# Altium PCB probe.PcbDoc (part 2 of 2)
Units mil, origin at the board's own origin, x right, y up, seen from the top; angles counter-clockwise.
Board outline 2800 x 2200 mil, 4 copper layers (Top Layer, Internal Plane 2, Internal Plane 1, Bottom Layer), stack 30.634 mil thick; 179 components, 135 nets, 563 pads, 179 vias.
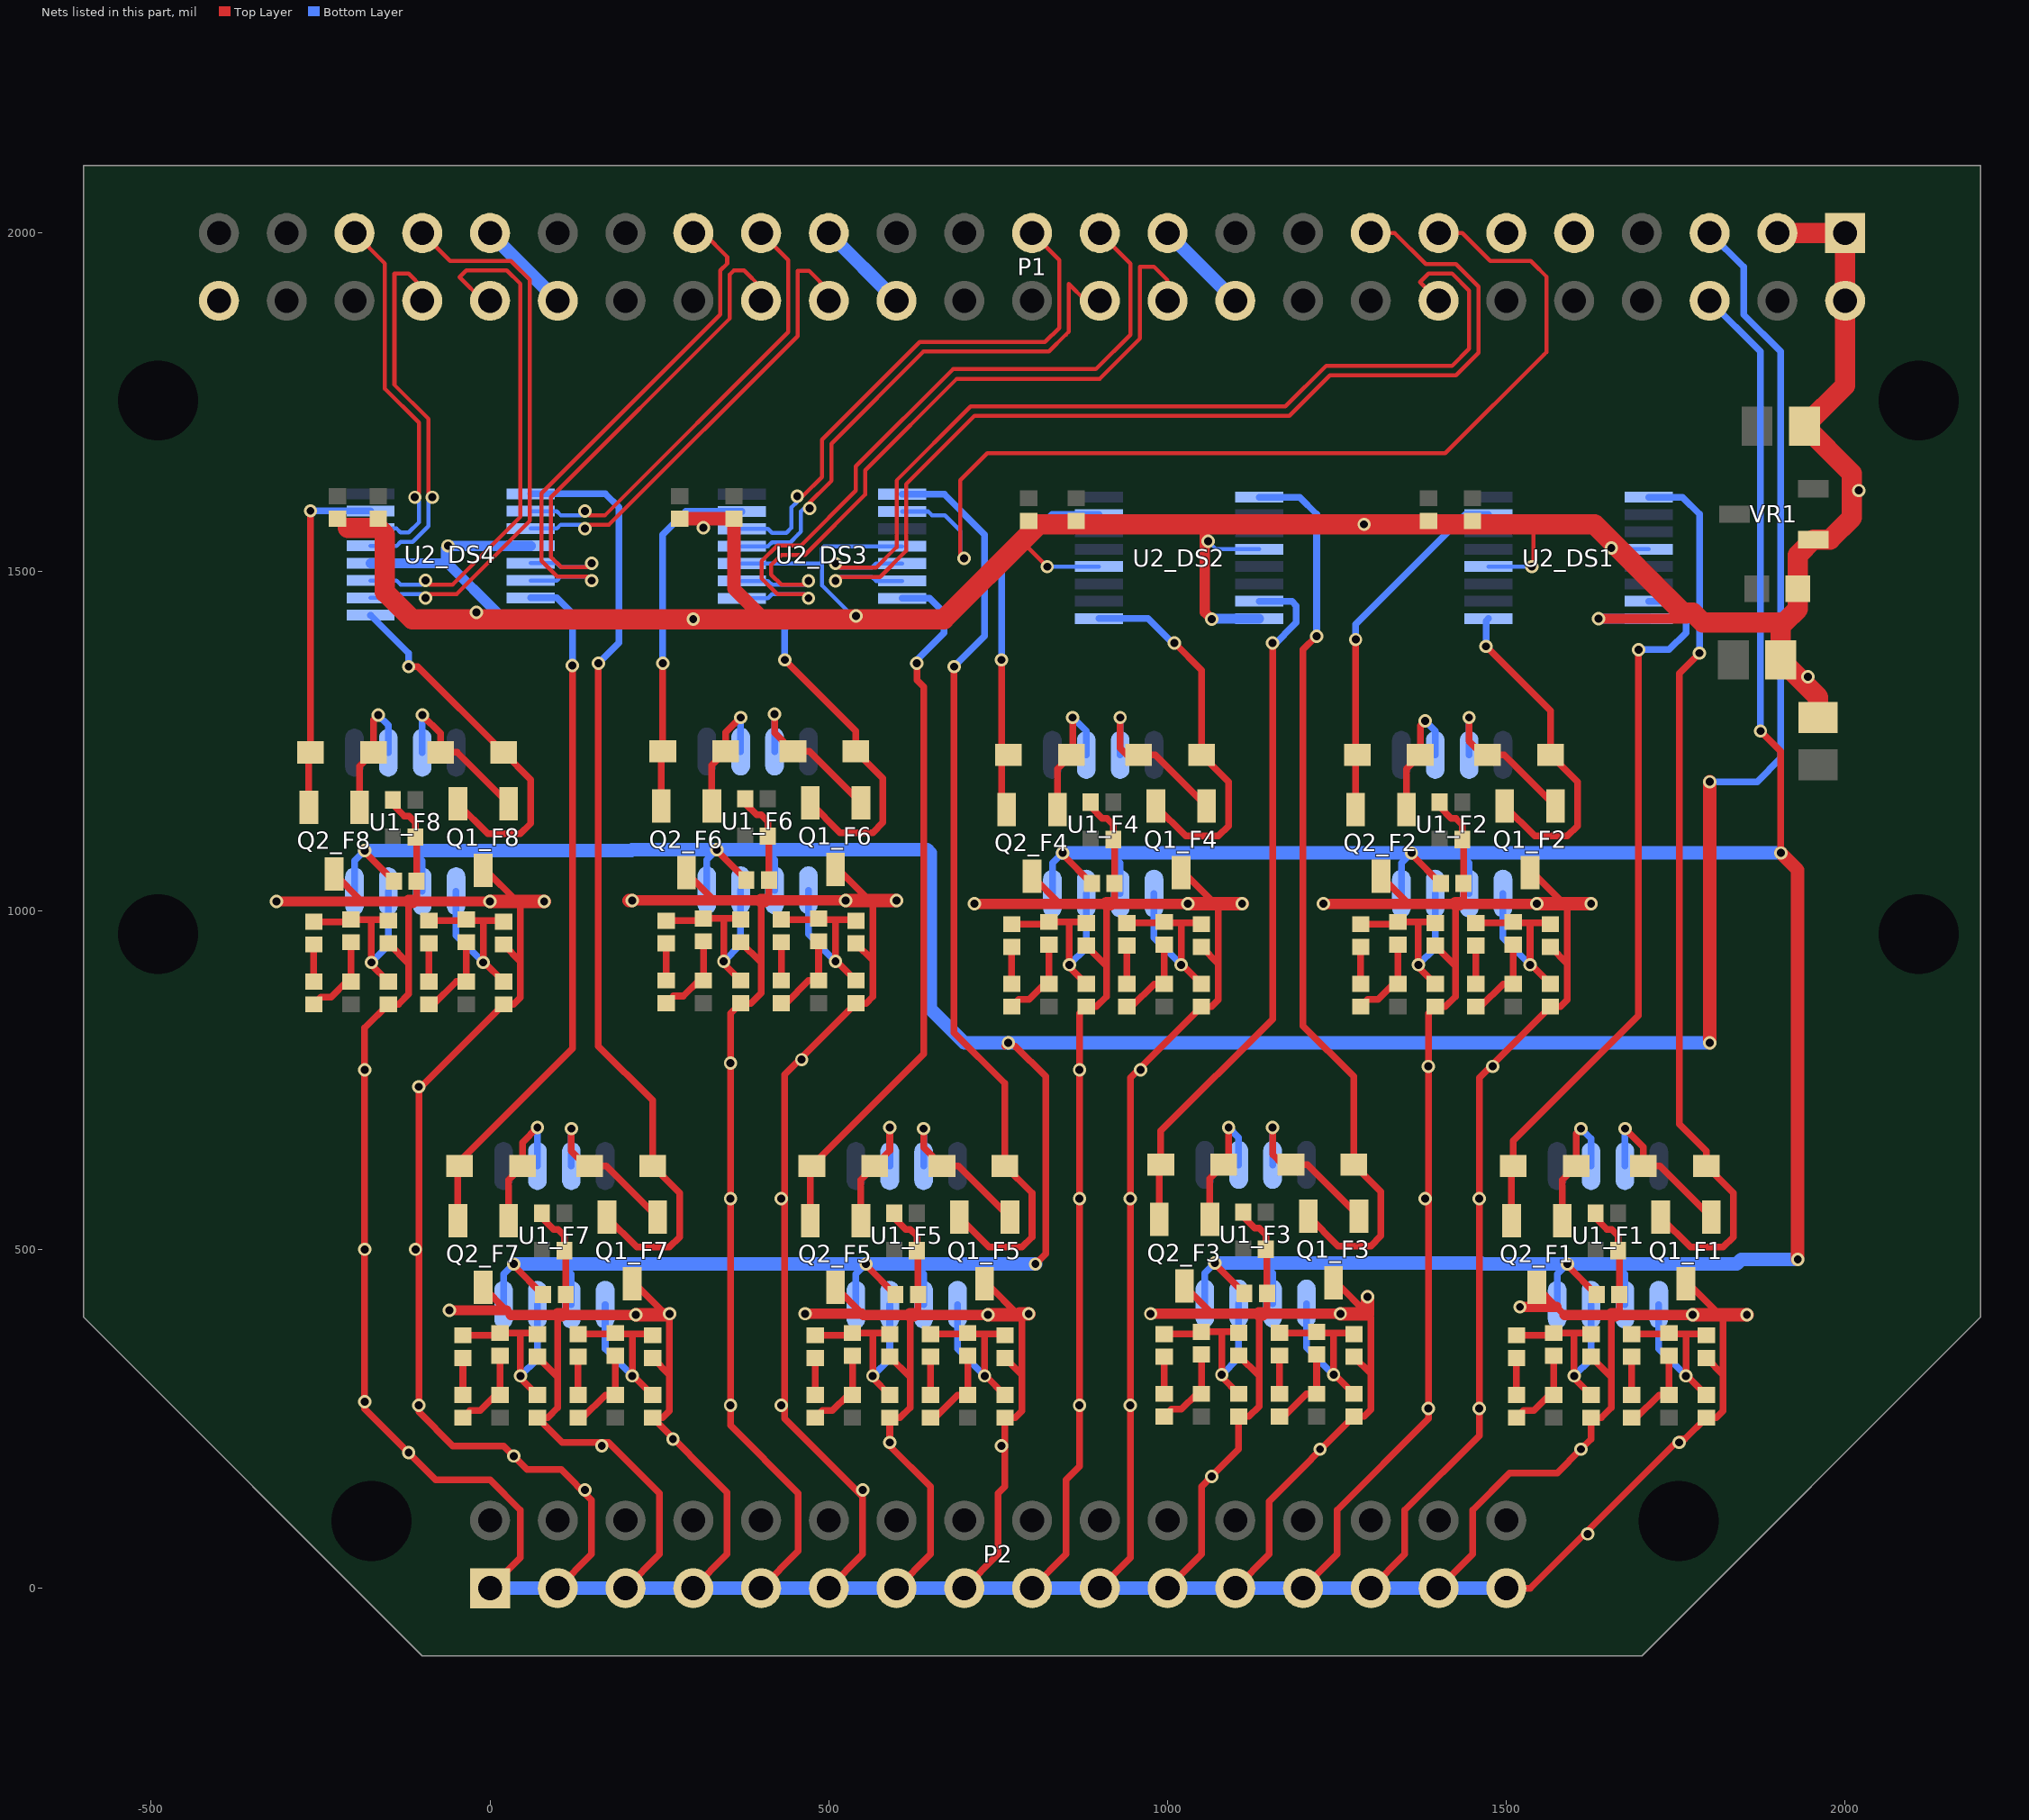
[diagram p4: the nets of this part, all layers, seen from the top]

## Via types
v1: diameter 19.68, hole 11.81, Top Layer to Bottom Layer, tented both sides, 126 vias
v2: diameter 19.68, hole 11.81, Top Layer to Bottom Layer, 50 vias
v3: diameter 31.5, hole 19.68, Top Layer to Bottom Layer, 2 vias
v4: diameter 31.5, hole 19.68, Top Layer to Bottom Layer, tented both sides, 1 vias

## Nets (pads, with @x,y where several pads share a name; then routed paths per layer and width w, separated by ;. In a path a pad name is that pad's centre, name@x,y a point inside that pad or via, vN(x,y) a via of type N, cw(c..) or ccw(c..) an arc to the next point about the centre after c; other vN are vias at no path point) (continued)
D8_P: P1.13 U2_DS3.2 | length 1498.8
  Top Layer w6: v1(699.84,1520) 694,1525.84 694,1635 734,1675 1409.8,1675 1554.9,1820.1 1559,1824.2 1559,1935.8 1539.9,1954.9 1535.8,1959 1476,1959 1435,2000 P1.13@1400,2000
  Bottom Layer w6: U2_DS3.2@608.11,1588.98 646.61,1588.98 652.4,1583.18 671.62,1583.18 689.9,1564.9 694,1560.8 694,1525.84 v1(699.84,1520)
D9_N: P1.14 U2_DS3.5 | length 1444.5
  Top Layer w6: v2(510,1512.25) 515.84,1506.41 570,1506.41 600,1536.41 600,1634.8 709.2,1744 1174,1744 1234,1804 1420,1804 1445,1829 1445,1915 1420,1940 1385,1940 1372.5,1927.5 P1.14@1400,1900
  Bottom Layer w6: v2(510,1512.25) 515.84,1506.41 563.81,1506.41 569.61,1512.2 U2_DS3.5@608.11,1512.2
D9_P: P1.15 U2_DS3.6 | length 1538.4
  Top Layer w6: v2(510,1486.57) 515.84,1492.41 575.8,1492.41 614,1530.61 614,1629 715,1730 1179.8,1730 1239.8,1790 1425.8,1790 1459,1823.2 1459,1920.8 1425.8,1954 1381,1954 1335,2000 P1.15@1300,2000
  Bottom Layer w6: v2(510,1486.57) 515.84,1492.41 563.81,1492.41 569.61,1486.61 U2_DS3.6@608.11,1486.61
D10_N: P1.22 U2_DS3.11 | length 1069.2
  Top Layer w6: v1(470,1486.66) 464.16,1480.82 430,1480.82 415,1495.82 415,1510 430,1525 464.8,1525 554,1614.2 554,1650 689,1785 899.8,1785 959,1844.2 959,1950 980,1950 1000,1930 P1.22@1000,1900
  Bottom Layer w6: U2_DS3.11@371.89,1486.61 410.39,1486.61 416.18,1480.82 464.16,1480.82 v1(470,1486.66)
D10_P: P1.23 U2_DS3.10 | length 1081.8
  Top Layer w6: v1(470,1460.98) 464.16,1466.82 424.2,1466.82 401,1490.02 401,1515.8 424.2,1539 459,1539 540,1620 540,1655.8 683.2,1799 894,1799 945,1850 945,1955 P1.23@900,2000
  Bottom Layer w6: U2_DS3.10@371.89,1461.02 410.39,1461.02 416.18,1466.82 464.16,1466.82 v1(470,1460.98)
D11_N: P1.24 U2_DS3.13 | length 795
  Top Layer w6: v2(471.53,1593.47) 471.53,1601.73 499.9,1630.1 504,1634.2 504,1689.2 639.8,1825 824.8,1825 849.9,1850.1 854,1854.2 854,1925 879,1900 P1.24@900,1900
  Bottom Layer w6: U2_DS3.13@371.89,1537.8 410.39,1537.8 416.19,1543.59 443.39,1543.59 454.9,1555.1 459,1559.2 459,1589.2 463.27,1593.47 v2(471.53,1593.47)
D11_P: P1.25 U2_DS3.14 | length 807
  Top Layer w6: v2(453.37,1611.63) 461.63,1611.63 490,1640 490,1695 634,1839 819,1839 840,1860 840,1960 P1.25@800,2000
  Bottom Layer w6: U2_DS3.14@371.89,1563.39 410.39,1563.39 416.19,1557.59 437.59,1557.59 445,1565 445,1595 453.37,1603.37 v2(453.37,1611.63)
D12_N: P1.32 U2_DS4.3 | length 685.7
  Top Layer w6: v1(140,1563.77) 145.84,1569.61 175.8,1569.61 454,1847.82 454,1944 471,1944 500,1915 P1.32@500,1900
  Bottom Layer w6: U2_DS4.3@60,1563.82 98.5,1563.82 104.3,1569.61 134.16,1569.61 v1(140,1563.77)
D12_P: P1.33 U2_DS4.2 | length 662
  Top Layer w6: v1(140,1589.46) 145.84,1583.61 170,1583.61 440,1853.61 440,1960 P1.33@400,2000
  Bottom Layer w6: U2_DS4.2@60,1589.41 98.5,1589.41 104.3,1583.61 134.16,1583.61 v1(140,1589.46)
D13_N: P1.34 U2_DS4.5 | length 768.8
  Top Layer w6: v1(150,1512.68) 144.16,1506.84 105,1506.84 90,1521.84 90,1610 354,1874 354,1939 360,1945 375,1945 400,1920 P1.34@400,1900
  Bottom Layer w6: U2_DS4.5@60,1512.64 98.5,1512.64 104.3,1506.84 144.16,1506.84 v1(150,1512.68)
D13_P: P1.35 U2_DS4.6 | length 807.9
  Top Layer w6: v1(150,1487) 144.16,1492.84 99.2,1492.84 76,1516.04 76,1615.8 340,1879.8 340,1944.8 350.1,1954.9 350.1,1964.9 315,2000 P1.35@300,2000
  Bottom Layer w6: U2_DS4.6@60,1487.05 98.5,1487.05 104.3,1492.84 144.16,1492.84 v1(150,1487)
D14_N: P1.42 U2_DS4.11 | length 765.6
  Top Layer w6: v1(-95,1487.09) -89.16,1481.25 -55,1481.25 45,1581.25 45,1925 25,1945 -35,1945 -45,1935 P1.42@-10,1900
  Bottom Layer w6: U2_DS4.11@-176.22,1487.05 -137.72,1487.05 -131.93,1481.25 -100.84,1481.25 v1(-95,1487.09)
D14_P: P1.43 U2_DS4.10 | length 830.3
  Top Layer w6: P1.43@-100,2000 -59,1959 30.8,1959 34.9,1954.9 59,1930.8 59,1575.45 -49.2,1467.25 -89.16,1467.25 v1(-95,1461.41)
  Bottom Layer w6: U2_DS4.10@-176.22,1461.46 -137.72,1461.46 -131.93,1467.25 -100.84,1467.25 v1(-95,1461.41)
D15_N: P1.44 U2_DS4.13 | length 564.8
  Top Layer w6: P1.44@-100,1900 -100,1920 -120,1940 -141,1940 -141,1775.8 -91,1725.8 -91,1615.84 v1(-85.16,1610)
  Bottom Layer w6: U2_DS4.13@-176.22,1538.23 -137.72,1538.23 -131.92,1544.02 -114.2,1544.02 -91,1567.22 -91,1604.16 v1(-85.16,1610)
D15_P: P1.45 U2_DS4.14 | length 551
  Top Layer w6: P1.45@-200,2000 -155,1955 -155,1770 -105,1720 -105,1615.84 v1(-110.84,1610)
  Bottom Layer w6: U2_DS4.14@-176.22,1563.82 -137.72,1563.82 -131.92,1558.02 -120,1558.02 -105,1573.02 -105,1604.16 v1(-110.84,1610)
GND: C2_F1.1 C2_F2.1 C2_F3.1 C2_F4.1 C2_F5.1 C2_F6.1 C2_F7.1 C2_F8.1 C4_F1.1 C4_F2.1 C4_F3.1 C4_F4.1 C4_F5.1 C4_F6.1 C4_F7.1 C4_F8.1 C5_F1.1 C5_F2.1 C5_F3.1 C5_F4.1 C5_F5.1 C5_F6.1 C5_F7.1 C5_F8.1 C6_F1.1 C6_F2.1 C6_F3.1 C6_F4.1 C6_F5.1 C6_F6.1 C6_F7.1 C6_F8.1 C7_F1.1 C7_F2.1 C7_F3.1 C7_F4.1 C7_F5.1 C7_F6.1 C7_F7.1 C7_F8.1 C8_DS1.1 C8_DS2.1 C8_DS3.1 C8_DS4.1 C9_DS1.1 C9_DS2.1 C9_DS3.1 C9_DS4.1 C10.1 C11.1 C12.1 C13.1 P1.1 P1.2 P1.3 P1.9 P1.11 P1.20 P1.21 P1.30 P1.31 P1.40 P1.41 P1.50 P2.1 P2.3 P2.5 P2.7 P2.9 P2.11 P2.13 P2.15 P2.17 P2.19 P2.21 P2.23 P2.25 P2.27 P2.29 P2.31 Q1_F1.3 Q1_F2.3 Q1_F3.3 Q1_F4.3 Q1_F5.3 Q1_F6.3 Q1_F7.3 Q1_F8.3 Q2_F1.3 Q2_F2.3 Q2_F3.3 Q2_F4.3 Q2_F5.3 Q2_F6.3 Q2_F7.3 Q2_F8.3 R4_F1.1 R4_F2.1 R4_F3.1 R4_F4.1 R4_F5.1 R4_F6.1 R4_F7.1 R4_F8.1 R8_F1.1 R8_F2.1 R8_F3.1 R8_F4.1 R8_F5.1 R8_F6.1 R8_F7.1 R8_F8.1 U2_DS1.4 U2_DS1.8 U2_DS1.12 U2_DS2.4 U2_DS2.8 U2_DS2.12 U2_DS3.4 U2_DS3.8 U2_DS3.12 U2_DS4.4 U2_DS4.8 U2_DS4.12 VR1.1 | length 26327.4
  Top Layer w6: C8_DS2.1@795,1575 795,1555 795,1535 v1(822.36,1507.64) ; v1(1537.64,1507.64) 1540,1510 1540,1570
  Top Layer w10: Q2_F8.3@-230,1054.25 -189.21,1013.46 ; C4_F8.1@-150,951.73 -120,921.73 ; C6_F8.1@-143.46,1163.46 -143.46,1156.77 -126.37,1139.67 -119.67,1139.67 -110,1130 C7_F8.1@-110,1108.46 -108.27,1106.73 C5_F8.1@-108.27,1043.46 -108.27,1019.8 -114.61,1013.46 ; -120,1013.46 -120,921.73 ; Q2_F7.3@-10,444.06 24.05,410 30.79,403.27 ; Q1_F8.3@-10,1059.25 -5.79,1059.25 40,1013.46 45,1008.46 45,925 ; P2.1@0,0 45,45 45,115 0,160 -80,160 v2(-120,200) -185,265 v2(-185,275) v2(-185,500) v2(-185,765) -185,826.73 R8_F8.1@-150,861.73 -135,861.73 -120,876.73 -120,921.73 ; C2_F8.1@20,950 45,925 ; C4_F7.1@70,341.54 100,311.54 ; C6_F7.1@76.54,553.27 76.54,546.57 93.63,529.47 100.33,529.47 110,519.8 C7_F7.1@110,498.27 111.73,496.54 C5_F7.1@111.73,433.27 111.73,409.61 105.39,403.27 ; P2.3@100,0 150,50 150,130 105,175 55,175 v2(35,195) 20,210 -55,210 -105,260 v2(-105,270) -105,736.73 R4_F8.1@20,861.73 35,861.73 45,871.73 45,925 ; 100,403.27 100,311.54 ; P2.5@200,0 250,50 250,140 175,215 106.54,215 R8_F7.1@70,251.54 85,251.54 100,266.54 100,311.54 ; Q1_F7.3@210,449.06 214.21,449.06 260,403.27 265,398.27 265,314.8 ; C2_F7.1@240,339.8 265,314.8 ; Q2_F6.3@290,1055.79 330.79,1015 ; P2.7@300,0 350,50 350,141.54 R4_F7.1@240,251.54 255,251.54 265,261.54 265,314.8 ; C4_F6.1@370,953.27 400,923.27 ; C6_F6.1@376.54,1165 376.54,1158.3 393.63,1141.2 400.33,1141.2 410,1131.54 C7_F6.1@410,1110 411.73,1108.27 C5_F6.1@411.73,1045 411.73,1021.34 405.39,1015 ; P2.9@400,0 455,55 455,140 355,240 v2(355,270) v2(355,575) v2(355,775) 355,848.27 R8_F6.1@370,863.27 385,863.27 400,878.27 400,923.27 ; 400,1015 400,923.27 ; P2.11@500,0 550,50 550,135 435,250 435,758.27 R4_F6.1@540,863.27 555,863.27 565,873.27 565,926.54 ; Q2_F5.3@510,444.06 549.06,405 550.79,403.27 ; Q1_F6.3@510,1060.79 514.21,1060.79 560,1015 565,1010 565,926.54 ; C2_F6.1@540,951.54 565,926.54 ; C4_F5.1@590,341.54 620,311.54 ; C6_F5.1@596.54,553.27 596.54,546.57 613.63,529.47 620.33,529.47 630,519.8 C7_F5.1@630,498.27 631.73,496.54 C5_F5.1@631.73,433.27 631.73,409.61 625.39,403.27 ; P2.13@600,0 650,50 650,150 590,210 v2(590,215) R8_F5.1@590,251.54 605,251.54 620,266.54 620,311.54 ; 620,403.27 620,311.54 ; P2.15@700,0 750,50 750,140 760,150 R4_F5.1@760,251.54 775,251.54 785,261.54 785,314.8 ; Q1_F5.3@730,449.06 734.21,449.06 780,403.27 785,398.27 785,314.8 ; C2_F5.1@760,339.8 785,314.8 ; P2.17@800,0 850,50 850,160 870,180 v2(870,270) v1(870,575) v1(870,765) 870,848.27 R8_F4.1@880,858.27 895,858.27 910,873.27 910,918.27 ; Q2_F4.3@800,1050.79 840.79,1010 ; C4_F4.1@880,948.27 910,918.27 ; C6_F4.1@886.54,1160 886.54,1153.3 903.63,1136.2 910.33,1136.2 920,1126.54 C7_F4.1@920,1105 921.73,1103.27 C5_F4.1@921.73,1040 921.73,1016.34 915.39,1010 ; P2.19@900,0 945,45 v2(945,270) v1(945,575) 945,753.27 R4_F4.1@1050,858.27 1065,858.27 1075,868.27 1075,921.54 ; 910,1010 910,918.27 ; P2.21@1000,0 1050,50 1050,150 v2(1065,165) 1105,205 R8_F3.1@1105,253.27 1120,253.27 1135,268.27 1135,313.27 ; Q1_F4.3@1020,1055.79 1024.21,1055.79 1070,1010 1075,1005 1075,921.54 ; Q2_F3.3@1025,445.79 1065.79,405 ; C2_F4.1@1050,946.54 1075,921.54 ; P2.23@1100,0 1150,50 1150,128.27 R4_F3.1@1275,253.27 1290,253.27 1300,263.27 1300,316.54 ; C4_F3.1@1105,343.27 1135,313.27 ; C6_F3.1@1111.54,555 1111.54,548.3 1128.63,531.2 1135.33,531.2 1145,521.54 C7_F3.1@1145,500 1146.73,498.27 C5_F3.1@1146.73,435 1146.73,411.34 1140.39,405 ; 1135,405 1135,313.27 ; P2.25@1200,0 1250,50 1250,115 1385,250 v2(1385,265) v1(1385,770) 1385,848.27 R8_F2.1@1395,858.27 1410,858.27 1425,873.27 1425,918.27 ; Q1_F3.3@1245,450.79 1249.21,450.79 1295,405 1300,400 1300,316.54 ; C2_F3.1@1275,341.54 1300,316.54 ; P2.27@1300,0 1350,50 1350,115 1460,225 v2(1460,265) v1(1460,575) 1460,753.27 R4_F2.1@1565,858.27 1580,858.27 1590,868.27 1590,921.54 ; Q2_F2.3@1315,1050.79 1355.79,1010 ; C4_F2.1@1395,948.27 1425,918.27 ; P2.29@1400,0 1450,50 1450,115 1505,170 1575,170 v2(1610,205) 1625,220 R8_F1.1@1625,251.54 1640,251.54 1655,266.54 1655,311.54 ; C6_F2.1@1401.54,1160 1401.54,1153.3 1418.63,1136.2 1425.33,1136.2 1435,1126.54 C7_F2.1@1435,1105 1436.73,1103.27 C5_F2.1@1436.73,1040 1436.73,1016.34 1430.39,1010 ; 1425,1010 1425,918.27 ; P2.31@1500,0 1535,0 1755,220 1763.46,220 R4_F1.1@1795,251.54 1810,251.54 1820,261.54 1820,314.8 ; Q1_F2.3@1535,1055.79 1539.21,1055.79 1585,1010 1590,1005 1590,921.54 ; Q2_F1.3@1545,444.06 1574.06,415 1585.79,403.27 ; C2_F2.1@1565,946.54 1590,921.54 ; C4_F1.1@1625,341.54 1655,311.54 ; C6_F1.1@1631.54,553.27 1631.54,546.57 1648.63,529.47 1655.33,529.47 1665,519.8 C7_F1.1@1665,498.27 1666.73,496.54 C5_F1.1@1666.73,433.27 1666.73,409.61 1660.39,403.27 ; 1655,403.27 1655,311.54 ; Q1_F1.3@1765,449.06 1769.21,449.06 1815,403.27 1820,398.27 1820,314.8 ; C2_F1.1@1795,339.8 1820,314.8
  Top Layer w15: v1(-315,1013.46) -189.21,1013.46 -120,1013.46 ; -114.61,1013.46 v1(0,1013.46) ; v1(-60,410) 24.05,410 ; 30.79,403.27 100,403.27 ; 105.39,403.27 v1(215,403.27) ; v1(210,1015) 330.79,1015 400,1015 ; 405.39,1015 v1(525,1015) ; v1(465,405) 549.06,405 ; 550.79,403.27 620,403.27 ; 625.39,403.27 v1(735,403.27) ; v1(715,1010) 840.79,1010 910,1010 ; 915.39,1010 v1(1030,1010) ; v1(975,405) 1065.79,405 1135,405 ; 1055,1570 1055,1440 v1(1065,1430) ; 1140.39,405 v1(1255,405) ; v1(1230,1010) 1355.79,1010 1425,1010 ; 1430.39,1010 v1(1545,1010) ; v1(1520,415) 1574.06,415 ; 1585.79,403.27 1655,403.27 ; v1(1635.87,1430.87) 1765.87,1430.87 1775,1440 ; 1660.39,403.27 v1(1775,403.27)
  Top Layer w20: -120,1013.46 -114.61,1013.46 ; v1(0,1013.46) 40,1013.46 v1(80,1013.46) ; 100,403.27 105.39,403.27 ; v1@205,1015 v1(210,1015) ; v1(215,403.27) 260,403.27 263.27,403.27 v1(265,405) ; C8_DS3.1@280,1578.27 C9_DS3.1@360,1578.27 360,1475 405,1430 ; 400,1015 405.39,1015 ; v1(525,1015) 560,1015 v1(600,1015) ; 620,403.27 625.39,403.27 ; v1(735,403.27) 780,403.27 781.73,405 v1(795,405) ; 910,1010 915.39,1010 ; v1(1030,1010) 1070,1010 v1(1110,1010) ; 1135,405 1140.39,405 ; v1(1255,405) 1295,405 v1(1295,430) ; 1425,1010 1430.39,1010 ; v1(1545,1010) 1585,1010 v1(1625,1010) ; 1655,403.27 1660.39,403.27 ; v1(1775,403.27) 1815,403.27 v1(1855,403.27)
  Top Layer w30: -210,1565 -165,1565 -155,1555 -155,1470 -115,1430 v2(300,1430) 405,1430 670,1430 795,1555 810,1570 1055,1570 v2(1290,1570) 1540,1570 1630,1570 1760,1440 1775,1440 1790,1425 1910,1425 ; P1.3@1900,2000 P1.1@2000,2000 P1.2@2000,1900 2000,1774.96 C10.1@1940.04,1715 2010,1645.04 2010,1580 1977.6,1547.6 VR1.1@1953.07,1547.6 1930,1524.53 C11.1@1930,1475 1930,1445 1910,1425 ; C12.1@1960,1285.04 1960,1315.04 C13.1@1905.04,1370 1905.04,1420.04 1910,1425
  Bottom Layer w6: U2_DS3.12@371.89,1512.2 487.8,1512.2 490,1510 ; v1(540,1435) 534.92,1435 490,1479.92 490,1510 ; U2_DS3.4@608.11,1537.8 492.8,1537.8 490,1535 490,1510 ; v1(822.36,1507.64) U2_DS2.12@898.78,1507.64 ; v1(1060,1545) 1071.77,1533.23 U2_DS2.4@1135,1533.23 ; U2_DS1.12@1473.78,1507.64 v1(1537.64,1507.64) ; v1(1655,1535) 1656.77,1533.23 U2_DS1.4@1710,1533.23
  Bottom Layer w15: U2_DS4.12@-176.22,1512.64 -67.36,1512.64 -65,1515 ; v1(-20,1440) -15.87,1435.87 14.13,1435.87 ; U2_DS4.8@60,1435.87 14.13,1435.87 ; U2_DS4.4@60,1538.23 v2(-61.77,1538.23) -65,1535 -65,1515 ; v1(540,1435) 540.43,1435.43 U2_DS3.8@608.11,1435.43 ; v1(1065,1430) 1065.87,1430.87 U2_DS2.8@1135,1430.87 ; v1(1635.87,1430.87) U2_DS1.8@1710,1430.87 ; -65,1515 14.13,1435.87
  Bottom Layer w20: P2.1@0,0 P2.3@100,0 P2.5@200,0 P2.7@300,0 P2.9@400,0 P2.11@500,0 P2.13@600,0 P2.15@700,0 P2.17@800,0 P2.19@900,0 P2.21@1000,0 P2.23@1100,0 P2.25@1200,0 P2.27@1300,0 P2.29@1400,0 P2.31@1500,0 ; P1.41@0,2000 P1.40@100,1900 ; P1.31@500,2000 P1.30@600,1900 ; P1.21@1000,2000 P1.20@1100,1900
  other v1: 1380,575 960,765 1480,770
  other v2: 1620,80 140,145 550,145 1225,205 165,210 755,210 1755,215 270,220 430,270 -110,500 430,575 -105,740 460,780 1945,1345 315,1565 2020,1620
NetC1_F1_1: C1_F1.1 R1_F1.2 | length 56.5
  Top Layer w10: R1_F1.2@1685,285 C1_F1.1@1685,341.54
NetC1_F1_2: C1_F1.2 C2_F1.2 R3_F1.2 R4_F1.2 U1_F1.1 | length 333.5
  Top Layer w10: C1_F1.2@1685,375 1765,375 ; v1@1765,315 1765,375 ; v1@1765.87,314.13 R4_F1.2@1795,285 ; C2_F1.2@1795,373.27 1793.27,375 1765,375
  Bottom Layer w10: U1_F1.1@1725,418.27 1725,353.27 v1(1765,313.27)
NetC1_F2_1: C1_F2.1 R1_F2.2 | length 56.5
  Top Layer w10: R1_F2.2@1455,891.73 C1_F2.1@1455,948.27
NetC1_F2_2: C1_F2.2 C2_F2.2 R3_F2.2 R4_F2.2 U1_F2.1 | length 333.5
  Top Layer w10: C1_F2.2@1455,981.73 1535,981.73 ; v1@1535,921.73 1535,981.73 ; v1@1535.87,920.87 R4_F2.2@1565,891.73 ; C2_F2.2@1565,980 1563.27,981.73 1535,981.73
  Bottom Layer w10: U1_F2.1@1495,1025 1495,960 v1(1535,920)
NetC1_F3_1: C1_F3.1 R1_F3.2 | length 56.5
  Top Layer w10: R1_F3.2@1165,286.73 C1_F3.1@1165,343.27
NetC1_F3_2: C1_F3.2 C2_F3.2 R3_F3.2 R4_F3.2 U1_F3.1 | length 333.5
  Top Layer w10: C1_F3.2@1165,376.73 1245,376.73 ; v1@1245,316.73 1245,376.73 ; v1@1245.87,315.87 R4_F3.2@1275,286.73 ; C2_F3.2@1275,375 1273.27,376.73 1245,376.73
  Bottom Layer w10: U1_F3.1@1205,420 1205,355 v1(1245,315)
NetC1_F4_1: C1_F4.1 R1_F4.2 | length 56.5
  Top Layer w10: R1_F4.2@940,891.73 C1_F4.1@940,948.27
NetC1_F4_2: C1_F4.2 C2_F4.2 R3_F4.2 R4_F4.2 U1_F4.1 | length 333.5
  Top Layer w10: C1_F4.2@940,981.73 1020,981.73 ; v1@1020,921.73 1020,981.73 ; v1@1020.87,920.87 R4_F4.2@1050,891.73 ; C2_F4.2@1050,980 1048.27,981.73 1020,981.73
  Bottom Layer w10: U1_F4.1@980,1025 980,960 v1(1020,920)
NetC1_F5_1: C1_F5.1 R1_F5.2 | length 56.5
  Top Layer w10: R1_F5.2@650,285 C1_F5.1@650,341.54
NetC1_F5_2: C1_F5.2 C2_F5.2 R3_F5.2 R4_F5.2 U1_F5.1 | length 333.5
  Top Layer w10: C1_F5.2@650,375 730,375 ; v1@730,315 730,375 ; v1@730.87,314.13 R4_F5.2@760,285 ; C2_F5.2@760,373.27 758.27,375 730,375
  Bottom Layer w10: U1_F5.1@690,418.27 690,353.27 v1(730,313.27)
NetC1_F6_1: C1_F6.1 R1_F6.2 | length 56.5
  Top Layer w10: R1_F6.2@430,896.73 C1_F6.1@430,953.27
NetC1_F6_2: C1_F6.2 C2_F6.2 R3_F6.2 R4_F6.2 U1_F6.1 | length 333.5
  Top Layer w10: C1_F6.2@430,986.73 510,986.73 ; v1@510,926.73 510,986.73 ; v1@510.87,925.87 R4_F6.2@540,896.73 ; C2_F6.2@540,985 538.27,986.73 510,986.73
  Bottom Layer w10: U1_F6.1@470,1030 470,965 v1(510,925)
NetC1_F7_1: C1_F7.1 R1_F7.2 | length 56.5
  Top Layer w10: R1_F7.2@130,285 C1_F7.1@130,341.54
NetC1_F7_2: C1_F7.2 C2_F7.2 R3_F7.2 R4_F7.2 U1_F7.1 | length 333.5
  Top Layer w10: C1_F7.2@130,375 210,375 ; v1@210,315 210,375 ; v1@210.87,314.13 R4_F7.2@240,285 ; C2_F7.2@240,373.27 238.27,375 210,375
  Bottom Layer w10: U1_F7.1@170,418.27 170,353.27 v1(210,313.27)
NetC1_F8_1: C1_F8.1 R1_F8.2 | length 56.5
  Top Layer w10: R1_F8.2@-90,895.2 C1_F8.1@-90,951.73
NetC1_F8_2: C1_F8.2 C2_F8.2 R3_F8.2 R4_F8.2 U1_F8.1 | length 333.5
  Top Layer w10: C1_F8.2@-90,985.2 -10,985.2 ; v1@-10,925.2 -10,985.2 ; v1@-9.13,924.33 R4_F8.2@20,895.2 ; C2_F8.2@20,983.46 18.27,985.2 -10,985.2
  Bottom Layer w10: U1_F8.1@-50,1028.46 -50,963.46 v1(-10,923.46)
NetC3_F1_1: C3_F1.1 R5_F1.2 | length 54.8
  Top Layer w10: R5_F1.2@1515,285 C3_F1.1@1515,339.8
NetC3_F1_2: C3_F1.2 C4_F1.2 R7_F1.2 R8_F1.2 U1_F1.3 | length 326
  Top Layer w10: C3_F1.2@1515,373.27 1566.73,373.27 R7_F1.2@1570,376.54 1600,376.54 ; v1@1600,310 R8_F1.2@1625,285 ; v1(1600,313.27) 1600,376.54 ; C4_F1.2@1625,375 1623.46,376.54 1600,376.54
  Bottom Layer w10: v1(1600,313.27) 1625,338.27 U1_F1.3@1625,418.27
NetC3_F2_1: C3_F2.1 R5_F2.2 | length 54.8
  Top Layer w10: R5_F2.2@1285,891.73 C3_F2.1@1285,946.54
NetC3_F2_2: C3_F2.2 C4_F2.2 R7_F2.2 R8_F2.2 U1_F2.3 | length 326
  Top Layer w10: C3_F2.2@1285,980 1336.73,980 R7_F2.2@1340,983.27 1370,983.27 ; v1@1370,916.73 R8_F2.2@1395,891.73 ; v1(1370,920) 1370,983.27 ; C4_F2.2@1395,981.73 1393.46,983.27 1370,983.27
  Bottom Layer w10: v1(1370,920) 1395,945 U1_F2.3@1395,1025
NetC3_F3_1: C3_F3.1 R5_F3.2 | length 54.8
  Top Layer w10: R5_F3.2@995,286.73 C3_F3.1@995,341.54
NetC3_F3_2: C3_F3.2 C4_F3.2 R7_F3.2 R8_F3.2 U1_F3.3 | length 326
  Top Layer w10: C3_F3.2@995,375 1046.73,375 R7_F3.2@1050,378.27 1080,378.27 ; v1@1080,311.73 R8_F3.2@1105,286.73 ; v1(1080,315) 1080,378.27 ; C4_F3.2@1105,376.73 1103.46,378.27 1080,378.27
  Bottom Layer w10: v1(1080,315) 1105,340 U1_F3.3@1105,420
NetC3_F4_1: C3_F4.1 R5_F4.2 | length 54.8
  Top Layer w10: R5_F4.2@770,891.73 C3_F4.1@770,946.54
NetC3_F4_2: C3_F4.2 C4_F4.2 R7_F4.2 R8_F4.2 U1_F4.3 | length 326
  Top Layer w10: C3_F4.2@770,980 821.73,980 R7_F4.2@825,983.27 855,983.27 ; v1@855,916.73 R8_F4.2@880,891.73 ; v1(855,920) 855,983.27 ; C4_F4.2@880,981.73 878.46,983.27 855,983.27
  Bottom Layer w10: v1(855,920) 880,945 U1_F4.3@880,1025
NetC3_F5_1: C3_F5.1 R5_F5.2 | length 54.8
  Top Layer w10: R5_F5.2@480,285 C3_F5.1@480,339.8
NetC3_F5_2: C3_F5.2 C4_F5.2 R7_F5.2 R8_F5.2 U1_F5.3 | length 326
  Top Layer w10: C3_F5.2@480,373.27 531.73,373.27 R7_F5.2@535,376.54 565,376.54 ; v1@565,310 R8_F5.2@590,285 ; v1(565,313.27) 565,376.54 ; C4_F5.2@590,375 588.46,376.54 565,376.54
  Bottom Layer w10: v1(565,313.27) 590,338.27 U1_F5.3@590,418.27
NetC3_F6_1: C3_F6.1 R5_F6.2 | length 54.8
  Top Layer w10: R5_F6.2@260,896.73 C3_F6.1@260,951.54
NetC3_F6_2: C3_F6.2 C4_F6.2 R7_F6.2 R8_F6.2 U1_F6.3 | length 326
  Top Layer w10: C3_F6.2@260,985 311.73,985 R7_F6.2@315,988.27 345,988.27 ; v1@345,921.73 R8_F6.2@370,896.73 ; v1(345,925) 345,988.27 ; C4_F6.2@370,986.73 368.46,988.27 345,988.27
  Bottom Layer w10: v1(345,925) 370,950 U1_F6.3@370,1030
NetC3_F7_1: C3_F7.1 R5_F7.2 | length 54.8
  Top Layer w10: R5_F7.2@-40,285 C3_F7.1@-40,339.8
NetC3_F7_2: C3_F7.2 C4_F7.2 R7_F7.2 R8_F7.2 U1_F7.3 | length 326
  Top Layer w10: C3_F7.2@-40,373.27 11.73,373.27 R7_F7.2@15,376.54 45,376.54 ; v1@45,310 R8_F7.2@70,285 ; v1(45,313.27) 45,376.54 ; C4_F7.2@70,375 68.46,376.54 45,376.54
  Bottom Layer w10: v1(45,313.27) 70,338.27 U1_F7.3@70,418.27
NetC3_F8_1: C3_F8.1 R5_F8.2 | length 54.8
  Top Layer w10: R5_F8.2@-260,895.2 C3_F8.1@-260,950
NetC3_F8_2: C3_F8.2 C4_F8.2 R7_F8.2 R8_F8.2 U1_F8.3 | length 326
  Top Layer w10: C3_F8.2@-260,983.46 -208.27,983.46 R7_F8.2@-205,986.73 -175,986.73 ; v1@-175,920.2 R8_F8.2@-150,895.2 ; v1(-175,923.46) -175,986.73 ; C4_F8.2@-150,985.2 -151.54,986.73 -175,986.73
  Bottom Layer w10: v1(-175,923.46) -150,948.46 U1_F8.3@-150,1028.46
NetD1_F1_1: D1_F1.1 Q1_F1.1 U1_F1.7 | length 253.2
  Top Layer w10: v2(1675,678.27) 1702.09,651.18 D1_F1.1@1702.09,623.27 1726.61,623.27 Q1_F1.1@1802.4,547.48
  Bottom Layer w10: U1_F1.7@1675,622.99 v2(1675,678.27)
NetD1_F1_2: D1_F1.2 Q1_F1.2 U2_DS1.1 | length 1329.6
  Top Layer w10: Q1_F1.2@1727.6,547.48 1771.81,503.27 1820,503.27 1835,518.27 1835,583.27 D1_F1.2@1795,623.27 1795,645 1755,685 1755,1350 v2(1785,1380)
  Bottom Layer w10: U2_DS1.1@1710,1610 1760,1610 1785,1585 v2(1785,1380)
NetD1_F2_1: D1_F2.1 Q1_F2.1 U1_F2.7 | length 257.4
  Top Layer w10: v1(1445,1285) 1445,1250 1465,1230 D1_F2.1@1472.09,1230 1496.61,1230 Q1_F2.1@1572.4,1154.21
  Bottom Layer w10: U1_F2.7@1445,1229.72 v1(1445,1285)
NetD1_F2_2: D1_F2.2 Q1_F2.2 U2_DS1.9 | length 495.3
  Top Layer w10: v1(1470,1390) 1565,1295 D1_F2.2@1565,1230 1605,1190 1605,1125 1590,1110 1541.81,1110 Q1_F2.2@1497.6,1154.21
  Bottom Layer w10: v1(1470,1390) 1470,1427.09 U2_DS1.9@1473.78,1430.87
NetD1_F3_1: D1_F3.1 Q1_F3.1 U1_F3.7 | length 260.3
  Top Layer w10: v1(1155,680) 1155,640 1170,625 D1_F3.1@1182.09,625 1206.61,625 Q1_F3.1@1282.4,549.21
  Bottom Layer w10: U1_F3.7@1155,624.72 v1(1155,680)
NetD1_F3_2: D1_F3.2 Q1_F3.2 U2_DS2.1 | length 1348.2
  Top Layer w10: Q1_F3.2@1207.6,549.21 1251.81,505 1300,505 1315,520 1315,585 D1_F3.2@1275,625 1275,755 1200,830 1200,1385 v1(1220,1405)
  Bottom Layer w10: U2_DS2.1@1135,1610 1195,1610 1220,1585 v1(1220,1405)
NetD1_F4_1: D1_F4.1 Q1_F4.1 U1_F4.7 | length 263.2
  Top Layer w10: v1(930,1285) 930,1240 940,1230 D1_F4.1@957.09,1230 981.61,1230 Q1_F4.1@1057.4,1154.21
  Bottom Layer w10: U1_F4.7@930,1229.72 v1(930,1285)
NetD1_F4_2: D1_F4.2 Q1_F4.2 U2_DS2.9 | length 561.1
  Top Layer w10: Q1_F4.2@982.6,1154.21 1026.81,1110 1075,1110 1090,1125 1090,1190 D1_F4.2@1050,1230 1050,1355 v1(1010,1395)
  Bottom Layer w10: U2_DS2.9@898.78,1430.87 970.87,1430.87 1006.73,1395 v1(1010,1395)
NetD1_F5_1: D1_F5.1 Q1_F5.1 U1_F5.7 | length 253.4
  Top Layer w10: v1(640,678.27) 640,650 666.73,623.27 D1_F5.1@667.09,623.27 691.61,623.27 Q1_F5.1@767.4,547.48
  Bottom Layer w10: U1_F5.7@640,622.99 v1(640,678.27)
NetD1_F5_2: D1_F5.2 Q1_F5.2 U2_DS3.1 | length 1381.5
  Top Layer w10: v1(685,1360) 685,820 760,745 D1_F5.2@760,623.27 800,583.27 800,518.27 785,503.27 736.81,503.27 Q1_F5.2@692.6,547.48
  Bottom Layer w10: U2_DS3.1@608.11,1614.57 670.43,1614.57 730,1555 730,1405 v1(685,1360)
NetD1_F6_1: D1_F6.1 Q1_F6.1 U1_F6.7 | length 253.2
  Top Layer w10: v1(420,1290) 420,1262.09 D1_F6.1@447.09,1235 471.61,1235 Q1_F6.1@547.4,1159.21
  Bottom Layer w10: U1_F6.7@420,1234.72 v1(420,1290)
NetD1_F6_2: D1_F6.2 Q1_F6.2 U2_DS3.9 | length 588.2
  Top Layer w10: v1(435,1370) 540,1265 D1_F6.2@540,1235 580,1195 580,1130 565,1115 516.81,1115 Q1_F6.2@472.6,1159.21
  Bottom Layer w10: U2_DS3.9@371.89,1435.43 454.57,1435.43 435,1415.87 v1(435,1370)
NetD1_F7_1: D1_F7.1 Q1_F7.1 U1_F7.7 | length 256.3
  Top Layer w10: v1(120,678.27) 120,645 141.73,623.27 D1_F7.1@147.09,623.27 171.61,623.27 Q1_F7.1@247.4,547.48
  Bottom Layer w10: U1_F7.7@120,622.99 v1(120,678.27)
NetD1_F7_2: D1_F7.2 Q1_F7.2 U2_DS4.1 | length 1409.1
  Top Layer w10: v1(160,1365) 160,800 240,720 D1_F7.2@240,623.27 280,583.27 280,518.27 265,503.27 216.81,503.27 Q1_F7.2@172.6,547.48
  Bottom Layer w10: U2_DS4.1@60,1615 170,1615 190,1595 190,1395 v1(160,1365)
NetD1_F8_1: D1_F8.1 Q1_F8.1 U1_F8.7 | length 253.2
  Top Layer w10: v1(-100,1288.46) -72.91,1261.38 D1_F8.1@-72.91,1233.46 -48.39,1233.46 Q1_F8.1@27.4,1157.68
  Bottom Layer w10: U1_F8.7@-100,1233.19 v1(-100,1288.46)
NetD1_F8_2: D1_F8.2 Q1_F8.2 U2_DS4.9 | length 545.1
  Top Layer w10: v1(-120,1360) -106.54,1360 D1_F8.2@20,1233.46 60,1193.46 60,1128.46 45,1113.46 -3.19,1113.46 Q1_F8.2@-47.4,1157.68
  Bottom Layer w10: U2_DS4.9@-176.22,1435.87 -120,1379.65 v1(-120,1360)
NetD2_F1_1: D2_F1.1 Q2_F1.1 U1_F1.6 | length 208.7
  Top Layer w10: Q2_F1.1@1582.4,542.48 1582.4,602.76 D2_F1.1@1602.91,623.27 1602.91,671.18 v2(1610,678.27)
  Bottom Layer w10: v2(1610,678.27) 1625,663.27 U1_F1.6@1625,622.99
NetD2_F1_2: D2_F1.2 Q2_F1.2 U2_DS1.7 | length 1095.2
  Top Layer w10: Q2_F1.2@1507.6,542.48 1507.6,620.87 D2_F1.2@1510,623.27 1510,660 1695,845 v2(1695,1385)
  Bottom Layer w10: v2(1695,1385) 1740,1385 1765,1410 1765,1445 1753.54,1456.46 U2_DS1.7@1710,1456.46
NetD2_F2_1: D2_F2.1 Q2_F2.1 U1_F2.6 | length 198.7
  Top Layer w10: Q2_F2.1@1352.4,1149.21 1352.4,1209.49 D2_F2.1@1372.91,1230 1372.91,1272.91 v1(1380,1280)
  Bottom Layer w10: v1(1380,1280) 1395,1265 U1_F2.6@1395,1229.72
NetD2_F2_2: D2_F2.2 Q2_F2.2 U2_DS1.15 | length 536.6
  Top Layer w10: Q2_F2.2@1277.6,1149.21 v1(1277.6,1400)
  Bottom Layer w10: v1(1277.6,1400) 1277.6,1422.6 1439.41,1584.41 U2_DS1.15@1473.78,1584.41
NetD2_F3_1: D2_F3.1 Q2_F3.1 U1_F3.6 | length 208.7
  Top Layer w10: Q2_F3.1@1062.4,544.21 1062.4,604.49 D2_F3.1@1082.91,625 1090,632.09 v1(1090,680)
  Bottom Layer w10: v1(1090,680) 1105,665 U1_F3.6@1105,624.72
NetD2_F3_2: D2_F3.2 Q2_F3.2 U2_DS2.7 | length 1057.3
  Top Layer w10: Q2_F3.2@987.6,544.21 987.6,622.6 D2_F3.2@990,625 990,675 1155,840 v1(1155,1395)
  Bottom Layer w10: U2_DS2.7@1135,1456.46 1183.54,1456.46 1190,1450 1190,1425 1155,1390 v1(1155,1395)
NetD2_F4_1: D2_F4.1 Q2_F4.1 U1_F4.6 | length 208.7
  Top Layer w10: Q2_F4.1@837.4,1149.21 837.4,1209.49 D2_F4.1@857.91,1230 860,1232.09 v1(860,1285)
  Bottom Layer w10: v1(860,1285) 880,1265 U1_F4.6@880,1229.72
NetD2_F4_2: D2_F4.2 Q2_F4.2 U2_DS2.15 | length 538.5
  Top Layer w10: v1(755,1370) 755,1156.81 Q2_F4.2@762.6,1149.21
  Bottom Layer w10: v1(755,1370) 755,1510 829.41,1584.41 U2_DS2.15@898.78,1584.41
NetD2_F5_1: D2_F5.1 Q2_F5.1 U1_F5.6 | length 212.2
  Top Layer w10: Q2_F5.1@547.4,542.48 547.4,602.76 D2_F5.1@567.91,623.27 590,645.35 v1(590,680)
  Bottom Layer w10: U1_F5.6@590,622.99 v1(590,680)
NetD2_F5_2: D2_F5.2 Q2_F5.2 U2_DS3.7 | length 1065.2
  Top Layer w10: Q2_F5.2@472.6,542.48 472.6,620.87 D2_F5.2@475,623.27 640,788.27 640,1330 630,1340 v1(630,1365)
  Bottom Layer w10: U2_DS3.7@608.11,1461.02 648.98,1461.02 670,1440 670,1410 625,1365 v1(630,1365)
NetD2_F6_1: D2_F6.1 Q2_F6.1 U1_F6.6 | length 198.7
  Top Layer w10: Q2_F6.1@327.4,1154.21 327.4,1214.49 D2_F6.1@347.91,1235 347.91,1262.91 v1(370,1285)
  Bottom Layer w10: U1_F6.6@370,1234.72 v1(370,1285)
NetD2_F6_2: D2_F6.2 Q2_F6.2 U2_DS3.15 | length 532.7
  Top Layer w10: Q2_F6.2@252.6,1154.21 252.6,1232.6 D2_F6.2@255,1235 v1(255,1365)
  Bottom Layer w10: v1(255,1365) 255,1555 288.98,1588.98 U2_DS3.15@371.89,1588.98
NetD2_F7_1: D2_F7.1 Q2_F7.1 U1_F7.6 | length 212.2
  Top Layer w10: Q2_F7.1@27.4,542.48 27.4,602.76 D2_F7.1@47.91,623.27 47.91,657.91 v1(70,680)
  Bottom Layer w10: U1_F7.6@70,622.99 v1(70,680)
NetD2_F7_2: D2_F7.2 Q2_F7.2 U2_DS4.7 | length 1037.1
  Top Layer w10: Q2_F7.2@-47.4,542.48 -47.4,620.87 D2_F7.2@-45,623.27 -45,630 121.6,796.6 v1(121.6,1361.6)
  Bottom Layer w10: U2_DS4.7@60,1461.46 98.54,1461.46 121.6,1438.4 v1(121.6,1361.6)
NetD2_F8_1: D2_F8.1 Q2_F8.1 U1_F8.6 | length 208.7
  Top Layer w10: Q2_F8.1@-192.6,1152.68 -192.6,1212.95 D2_F8.1@-172.09,1233.46 -172.09,1281.38 v1(-165,1288.46)
  Bottom Layer w10: v1(-165,1288.46) -150,1273.46 U1_F8.6@-150,1233.19
NetD2_F8_2: D2_F8.2 Q2_F8.2 U2_DS4.15 | length 527.3
  Top Layer w10: Q2_F8.2@-267.4,1152.68 -267.4,1231.06 D2_F8.2@-265,1233.46 v1(-265,1590)
  Bottom Layer w10: v1(-265,1590) -176.81,1590 U2_DS4.15@-176.22,1589.41
NetR1_F1_1: R1_F1.1 R2_F1.2 R3_F1.1 | length 126.9
  Top Layer w10: R1_F1.1@1685,251.54 1691.7,251.54 1725.16,285 R2_F1.2@1740,285 R3_F1.1@1740,343.07
NetR1_F2_1: R1_F2.1 R2_F2.2 R3_F2.1 | length 126.9
  Top Layer w10: R1_F2.1@1455,858.27 1461.7,858.27 1495.16,891.73 R2_F2.2@1510,891.73 R3_F2.1@1510,949.8
NetR1_F3_1: R1_F3.1 R2_F3.2 R3_F3.1 | length 126.9
  Top Layer w10: R1_F3.1@1165,253.27 1171.7,253.27 1205.16,286.73 R2_F3.2@1220,286.73 R3_F3.1@1220,344.8
NetR1_F4_1: R1_F4.1 R2_F4.2 R3_F4.1 | length 126.9
  Top Layer w10: R1_F4.1@940,858.27 946.7,858.27 980.16,891.73 R2_F4.2@995,891.73 R3_F4.1@995,949.8
NetR1_F5_1: R1_F5.1 R2_F5.2 R3_F5.1 | length 126.9
  Top Layer w10: R1_F5.1@650,251.54 656.7,251.54 690.16,285 R2_F5.2@705,285 R3_F5.1@705,343.07
NetR1_F6_1: R1_F6.1 R2_F6.2 R3_F6.1 | length 126.9
  Top Layer w10: R1_F6.1@430,863.27 436.7,863.27 470.16,896.73 R2_F6.2@485,896.73 R3_F6.1@485,954.8
NetR1_F7_1: R1_F7.1 R2_F7.2 R3_F7.1 | length 126.9
  Top Layer w10: R1_F7.1@130,251.54 136.7,251.54 170.16,285 R2_F7.2@185,285 R3_F7.1@185,343.07
NetR1_F8_1: R1_F8.1 R2_F8.2 R3_F8.1 | length 126.9
  Top Layer w10: R1_F8.1@-90,861.73 -83.3,861.73 -49.84,895.2 R2_F8.2@-35,895.2 R3_F8.1@-35,953.27
NetR5_F1_1: R5_F1.1 R6_F1.2 R7_F1.1 | length 126.9
  Top Layer w10: R5_F1.1@1515,251.54 1525.65,262.19 1540.49,262.19 1563.3,285 R6_F1.2@1570,285 R7_F1.1@1570,343.07
NetR5_F2_1: R5_F2.1 R6_F2.2 R7_F2.1 | length 126.9
  Top Layer w10: R5_F2.1@1285,858.27 1295.65,868.92 1310.49,868.92 1333.3,891.73 R6_F2.2@1340,891.73 R7_F2.1@1340,949.8
NetR5_F3_1: R5_F3.1 R6_F3.2 R7_F3.1 | length 126.9
  Top Layer w10: R5_F3.1@995,253.27 1005.65,263.92 1020.49,263.92 1043.3,286.73 R6_F3.2@1050,286.73 R7_F3.1@1050,344.8
NetR5_F4_1: R5_F4.1 R6_F4.2 R7_F4.1 | length 126.9
  Top Layer w10: R5_F4.1@770,858.27 780.65,868.92 795.49,868.92 818.3,891.73 R6_F4.2@825,891.73 R7_F4.1@825,949.8
NetR5_F5_1: R5_F5.1 R6_F5.2 R7_F5.1 | length 126.9
  Top Layer w10: R5_F5.1@480,251.54 490.65,262.19 505.49,262.19 528.3,285 R6_F5.2@535,285 R7_F5.1@535,343.07
NetR5_F6_1: R5_F6.1 R6_F6.2 R7_F6.1 | length 126.9
  Top Layer w10: R5_F6.1@260,863.27 270.65,873.92 285.49,873.92 308.3,896.73 R6_F6.2@315,896.73 R7_F6.1@315,954.8
NetR5_F7_1: R5_F7.1 R6_F7.2 R7_F7.1 | length 126.9
  Top Layer w10: R5_F7.1@-40,251.54 -29.35,262.19 -14.51,262.19 8.3,285 R6_F7.2@15,285 R7_F7.1@15,343.07
NetR5_F8_1: R5_F8.1 R6_F8.2 R7_F8.1 | length 126.9
  Top Layer w10: R5_F8.1@-260,861.73 -249.35,872.39 -234.51,872.39 -211.7,895.2 R6_F8.2@-205,895.2 R7_F8.1@-205,953.27
VREF0-7: C5_F1.2 C5_F2.2 C5_F3.2 C5_F4.2 P1.6 U1_F1.2 U1_F1.4 U1_F2.2 U1_F2.4 U1_F3.2 U1_F3.4 U1_F4.2 U1_F4.4 | length 4173.7
  Top Layer w10: v1(845,1085) 845,1083.27 C5_F4.2@888.27,1040 ; v1(1070,480) 1070,478.27 C5_F3.2@1113.27,435 ; v1(1360,1085) 1360,1083.27 C5_F2.2@1403.27,1040 ; v1(1590,478.27) 1590,476.54 C5_F1.2@1633.27,433.27 ; v2(1875,1265) 1905,1235 v1(1905,1085)
  Top Layer w20: v1(1905,1085) 1930,1060 v2(1930,485)
  Bottom Layer w10: U1_F4.4@830,1025 830,1070 v1(845,1085) ; 915,1085 930,1070 U1_F4.2@930,1025 ; U1_F3.4@1055,420 1055,465 v1(1070,480) ; 1140,480 1155,465 U1_F3.2@1155,420 ; U1_F2.4@1345,1025 1345,1070 v1(1360,1085) ; 1430,1085 1445,1070 U1_F2.2@1445,1025 ; U1_F1.4@1575,418.27 1575,463.27 v1(1590,478.27) ; 1660,478.27 1675,463.27 U1_F1.2@1675,418.27 ; P1.6@1800,1900 1875,1825 v2(1875,1265)
  Bottom Layer w20: v1(845,1085) 915,1085 v1(1360,1085) 1430,1085 v1(1905,1085) ; v1(1070,480) 1140,480 1463.27,480 1465,478.27 v1(1590,478.27) 1660,478.27 1840,478.27 1846.73,485 v2(1930,485)
VREF8-15: C5_F5.2 C5_F6.2 C5_F7.2 C5_F8.2 P1.5 U1_F5.2 U1_F5.4 U1_F6.2 U1_F6.4 U1_F7.2 U1_F7.4 U1_F8.2 U1_F8.4 | length 5466.5
  Top Layer w10: v1(-185,1088.46) -185,1086.73 C5_F8.2@-141.73,1043.46 ; v1(35,478.27) 35,476.54 C5_F7.2@78.27,433.27 ; v1(335,1090) 335,1088.27 C5_F6.2@378.27,1045 ; v1(555,478.27) 555,476.54 C5_F5.2@598.27,433.27 ; v1@760,800 v1(765,805) ; 775,800 820,755 820,493.27 v1(805,478.27)
  Top Layer w20: v2(1800,805) v2(1800,1190)
  Bottom Layer w10: U1_F8.4@-200,1028.46 -200,1073.46 v1(-185,1088.46) ; -115,1088.46 -100,1073.46 U1_F8.2@-100,1028.46 ; U1_F7.4@20,418.27 20,463.27 v1(35,478.27) ; 105,478.27 120,463.27 U1_F7.2@120,418.27 ; U1_F6.4@320,1030 320,1075 v1(335,1090) ; 405,1090 420,1075 U1_F6.2@420,1030 ; U1_F5.4@540,418.27 540,463.27 v1(555,478.27) ; 625,478.27 640,463.27 U1_F5.2@640,418.27 ; v2(1800,1190) 1870,1190 1905,1225 1905,1825 1850,1880 1850,1950 P1.5@1800,2000
  Bottom Layer w20: v1(-185,1088.46) -115,1088.46 208.46,1088.46 210,1090 v1(335,1090) 405,1090 645,1090 650,1085 650,855 700,805 v1(765,805) v2(1800,805) ; v1(35,478.27) 105,478.27 v1(555,478.27) 625,478.27 v1(805,478.27)

## Polygon pours and split planes (outlines as drawn)
+3V3 on Internal Plane 2 (split plane): -185.96,1515 -185.75,1513.46 -185.16,1512.02 -184.21,1510.79 -119.21,1445.79 -117.98,1444.84 -116.54,1444.25 -115,1444.04 150,1444.04 151.54,1444.25 152.98,1444.84 154.21,1445.79 259.21,1550.79 260.16,1552.02 260.75,1553.46 260.96,1555 260.96,1632.53 287.47,1659.04 352.53,1659.04 379.04,1632.53 379.04,1480 379.25,1478.46 379.84,1477.02 380.79,1475.79 410.79,1445.79 412.02,1444.84 413.46,1444.25 415,1444.04 665,1444.04 666.54,1444.25 667.98,1444.84 669.21,1445.79 714.21,1490.79 715.16,1492.02 715.75,1493.46 715.96,1495 715.96,1632.53 742.47,1659.04 847.53,1659.04 899.04,1607.53 899.04,1507.47 772.53,1380.96 -232.53,1380.96 -314.04,1462.47 -314.04,1642.53 -277.53,1679.04 -185.96,1679.04
GND on Internal Plane 2 (split plane): 2179.9,408.32 1691.68,-79.9 -91.68,-79.9 -579.9,408.32 -579.9,2079.9 2179.9,2079.9
GND on Internal Plane 1 (split plane): 2179.9,408.32 1691.68,-79.9 -91.68,-79.9 -579.9,408.32 -579.9,2079.9 2179.9,2079.9

## Other copper
Internal Plane 2 (plane layer: these items are gaps in the copper):
  lines w11.81: -320,1460 -235,1375 775,1375 905,1505 905,1610 850,1665 740,1665 710,1635 710,1495 665,1450 415,1450 385,1480 385,1635 355,1665 285,1665 255,1635 255,1555 150,1450 -115,1450 -180,1515 -180,1685 -280,1685 -320,1645 -320,1460

## Silkscreen, mask and mechanical layers (free items; w line width, h text height)
Top Overlay:
  rectangle: 1250,700 1785,815
  lines w11.81: -40,45 -40,-40 1540,-40 1540,45 -35,45
  text "MSO5000 LA Probe 2020" at 610,750 h30
  text "D9" at 615,150 h30 r90
  text "D8" at 715,150 h30 r90
  text "D7" at 815,150 h30 r90
  text "D6" at 915,150 h30 r90
  text "D5" at 1015,150 h30 r90
  text "D4" at 1115,150 h30 r90
  text "D3" at 1215,150 h30 r90
  text "D2" at 1315,150 h30 r90
  text "D1" at 1415,150 h30 r90
  text "D0" at 1515,150 h30 r90
  text "D15" at 15,140 h30 r90
  text "D14" at 115,140 h30 r90
  text "D13" at 215,140 h30 r90
  text "D12" at 315,140 h30 r90
  text "D11" at 415,140 h30 r90
  text "D10" at 515,140 h30 r90
  text "GND" at -140,-15 h30
  text "GND" at 1560,-15 h30
Bottom Overlay:
  lines w11.81: -50,-50 1550,-50 1550,50 -50,50 -50,-50
  text "GND" at -75,-15 h30
  text "GND" at 1655,-15 h30
Mechanical 1:
  lines w11.81: -600,400 -100,-100 1600,-100 1700,-100 2200,400 2200,2100 -600,2100 -600,400
Drill Drawing:
  text ".Legend" at 2410,250 h30

## Text inside footprints (layer, text, board x,y; h text height)
P1: Top Overlay "2" at 2100,1920 h50 r180; Top Overlay "1" at 2100,2020 h50 r180; Top Overlay "49" at -460,2020 h50 r180; Top Overlay "50" at -460,1920 h50 r180